# Altium PCB ESP32Designv1.1.PcbDoc (part 2 of 3)
Units mil, origin at the board's own origin, x right, y up, seen from the top; angles counter-clockwise.
Board outline 2700 x 1000 mil, 4 copper layers (L1, L2, L3, L4), stack 61.583 mil thick; 64 components, 73 nets, 299 pads, 159 vias.
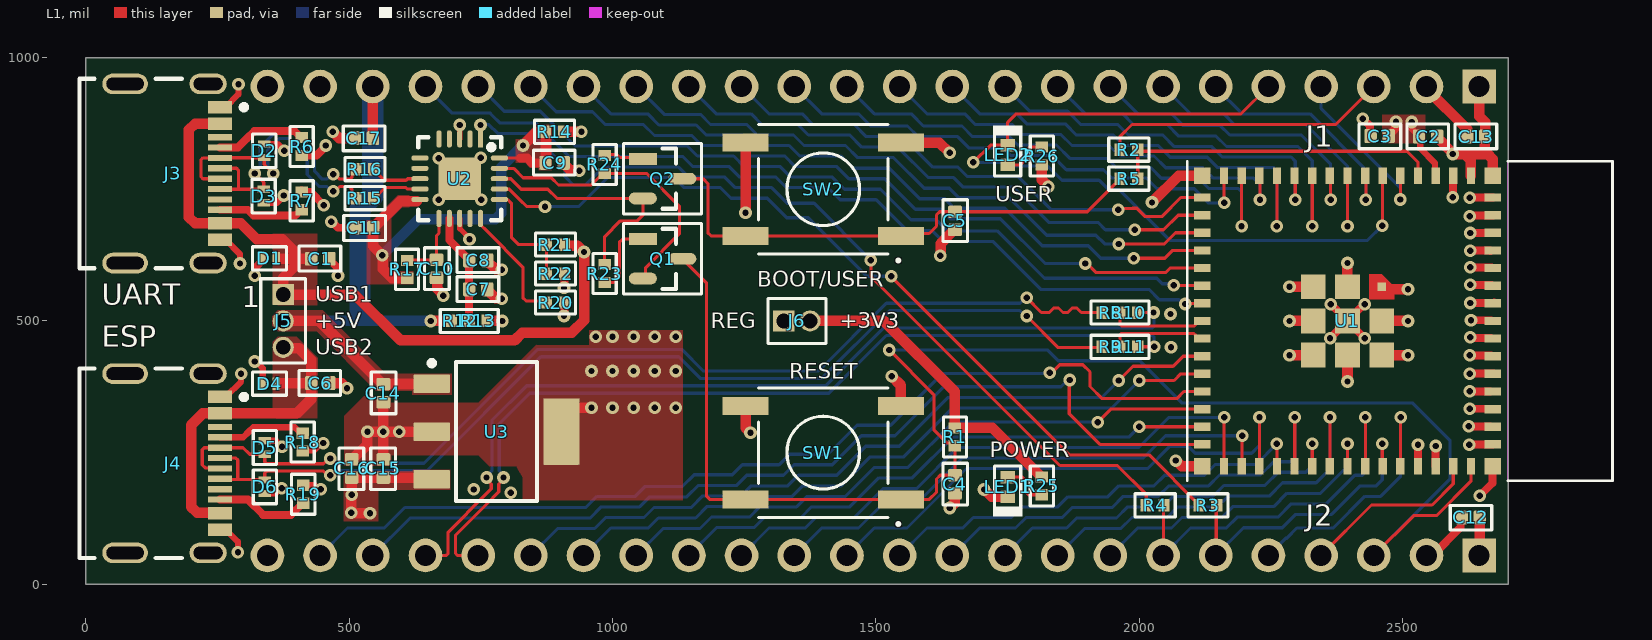
[diagram p0: L1 view]

## Part data (continued)
R2 R5: library part RC0402FR-0727RL, "RES 27 OHM 1% 1/16W 0402", Case Code (Imperial)=0402, Case Code (Metric)=1005, LCSC Part Number=C138021, Manufacturer="Yageo Group", Max Operating Temperature=155°C, Max Power Dissipation=63mW, Min Operating Temperature=-55°C, Power Dissipation=62.5mW, Supplier Part Number=YAG3086CT-ND, Temperature Coefficient=100ppm/°C, Tolerance=1%, Voltage Rating=50V, Case/Package=0402, Category="Chip SMD Resistors", China RoHS=Non-Compliant, ComponentLink1Description=https://datasheet.octopart.com:443/RC0402FR-0727RL-Yageo-datasheet-175887523.pdf?src-supplier=Newark, ComponentLink1URL=https://datasheet.octopart.com:443/RC0402FR-0727RL-Yageo-datasheet-175887523.pdf?src-supplier=Newark, ComponentLink2Description=https://datasheet.octopart.com:443/RC0402FR-0727RL-Yageo-datasheet-8324527.pdf?src-supplier=Newark, ComponentLink2URL=https://datasheet.octopart.com:443/RC0402FR-0727RL-Yageo-datasheet-8324527.pdf?src-supplier=Newark, ComponentLink3Description=https://datasheet.octopart.com:443/RC0402FR-0727RL-Yageo-datasheet-103092701.pdf?src-supplier=Upverter, ComponentLink3URL=https://datasheet.octopart.com:443/RC0402FR-0727RL-Yageo-datasheet-103092701.pdf?src-supplier=Upverter, ComponentLink4Description=https://datasheet.octopart.com:443/RC0402FR-0727RL-Yageo-datasheet-10408619.pdf?src-supplier=element14+APAC, ComponentLink4URL=https://datasheet.octopart.com:443/RC0402FR-0727RL-Yageo-datasheet-10408619.pdf?src-supplier=element14+APAC, ComponentLink5Description=https://datasheet.octopart.com:443/RC0402FR-0727RL-Yageo-datasheet-62067350.pdf?src-supplier=element14+APAC, ComponentLink5URL=https://datasheet.octopart.com:443/RC0402FR-0727RL-Yageo-datasheet-62067350.pdf?src-supplier=element14+APAC, ComponentLink6Description=https://datasheet.octopart.com:443/RC0402FR-0727RL-Yageo-datasheet-175423674.pdf?src-supplier=SOS+electronic, ComponentLink6URL=https://datasheet.octopart.com:443/RC0402FR-0727RL-Yageo-datasheet-175423674.pdf?src-supplier=SOS+electronic, ComponentLink7Description=https://datasheet.octopart.com:443/RC0402FR-0727RL-Yageo-datasheet-8329306.pdf?src-supplier=SOS+electronic, ComponentLink7URL=https://datasheet.octopart.com:443/RC0402FR-0727RL-Yageo-datasheet-8329306.pdf?src-supplier=SOS+electronic, ComponentLink8Description=https://datasheet.octopart.com:443/RC0402FR-0727RL-Yageo-datasheet-164759695.pdf?src-supplier=Future+Electronics, ComponentLink8URL=https://datasheet.octopart.com:443/RC0402FR-0727RL-Yageo-datasheet-164759695.pdf?src-supplier=Future+Electronics, ComponentLink9Description=https://datasheet.octopart.com:443/RC0402FR-0727RL-Yageo-datasheet-137700087.pdf?src-supplier=Future+Electronics, ComponentLink9URL=https://datasheet.octopart.com:443/RC0402FR-0727RL-Yageo-datasheet-137700087.pdf?src-supplier=Future+Electronics, ComponentLink10Description=https://datasheet.octopart.com:443/RC0402FR-0727RL-Yageo-datasheet-12531192.pdf?src-supplier=Future+Electronics, ComponentLink10URL=https://datasheet.octopart.com:443/RC0402FR-0727RL-Yageo-datasheet-12531192.pdf?src-supplier=Future+Electronics, ComponentLink11Description=https://datasheet.octopart.com:443/RC0402FR-0727RL-Yageo-datasheet-148775077.pdf?src-supplier=TME, ComponentLink11URL=https://datasheet.octopart.com:443/RC0402FR-0727RL-Yageo-datasheet-148775077.pdf?src-supplier=TME, ComponentLink12Description=https://datasheet.octopart.com/RC0402FR-0727RL-Yageo-datasheet-73766026.pdf, ComponentLink12URL=https://datasheet.octopart.com/RC0402FR-0727RL-Yageo-datasheet-73766026.pdf, ComponentLink13Description=http://sigma.octopart.com:80/conflict_mineral_statement/Yageo-company-3.pdf?src-supplier=Compliance+Statements, ComponentLink13URL=http://sigma.octopart.com:80/conflict_mineral_statement/Yageo-company-3.pdf?src-supplier=Compliance+Statements, ComponentLink14Description=http://sigma.octopart.com:80/rohs_statement/Yageo-company-2.pdf?src-supplier=Compliance+Statements, ComponentLink14URL=http://sigma.octopart.com:80/rohs_statement/Yageo-company-2.pdf?src-supplier=Compliance+Statements, Composition="Thick Film", Depth=500µm, Features="Moisture Resistant", Height=350µm, Lead Free="Lead Free", Length=1mm, Lifecycle Status=Production, Manufacturer Part Number=RC0402FR-0727RL, Military Standard=Not, Mounting Technology="Surface Mount", Number of Terminals=2, Number of Terminations=2, Pins=2, Power Rating=63mW, Pricing="1=0.1, 10=0.007, 25=0.0068, 50=0.0062, 100=0.0051, 250=0.00308 (USD)", REACH SVHC=Yes, RoHS=Compliant, Schedule B="8533210045, 8533210045|8533210045, 8533210045|8533210045|8533210045, 8533210045|8533210045|8533210045|8533210045", Stock=351229, Supplier=DigiKey, Termination=SMD/SMT, Voltage Rating (AC)=50V, Voltage Rating (DC)=50V, Weight=652.039032µg, Width=500µm, Working Voltage=50V
R3 R4 R8 R9 R10 R11 R12 R13 R14 R15 R16 R17: library part RC0402JR-070RL, "RES 0 OHM JUMPER 1/16W 0402", Case Code (Imperial)=0402, Manufacturer="Yageo Group", Max Operating Temperature=155°C, Max Power Dissipation=63mW, Min Operating Temperature=-55°C, Power Rating=62.5mW, Supplier Part Number=311-0.0JRDKR-ND, Temperature Coefficient=200ppm/°C, Tolerance=5%, Voltage Rating=50V, Case/Package=0402, Category="Chip SMD Resistors", China RoHS=Non-Compliant, ComponentLink1Description=https://datasheet.octopart.com:443/RC0402JR-070RL-Yageo-datasheet-182189538.pdf?src-supplier=IHS, ComponentLink1URL=https://datasheet.octopart.com:443/RC0402JR-070RL-Yageo-datasheet-182189538.pdf?src-supplier=IHS, ComponentLink2Description=https://datasheet.octopart.com:443/RC0402JR-070RL-Yageo-datasheet-10408619.pdf?src-supplier=Newark, ComponentLink2URL=https://datasheet.octopart.com:443/RC0402JR-070RL-Yageo-datasheet-10408619.pdf?src-supplier=Newark, ComponentLink3Description=https://datasheet.octopart.com:443/RC0402JR-070RL-Yageo-Group-datasheet-181964826.pdf?src-supplier=Newark, ComponentLink3URL=https://datasheet.octopart.com:443/RC0402JR-070RL-Yageo-Group-datasheet-181964826.pdf?src-supplier=Newark, ComponentLink4Description=https://datasheet.octopart.com:443/RC0402JR-070RL-Yageo-Group-datasheet-190305687.pdf?src-supplier=Future+Electronics, ComponentLink4URL=https://datasheet.octopart.com:443/RC0402JR-070RL-Yageo-Group-datasheet-190305687.pdf?src-supplier=Future+Electronics, ComponentLink5Description=https://datasheet.octopart.com:443/RC0402JR-070RL-Yageo-datasheet-164759695.pdf?src-supplier=Future+Electronics, ComponentLink5URL=https://datasheet.octopart.com:443/RC0402JR-070RL-Yageo-datasheet-164759695.pdf?src-supplier=Future+Electronics, ComponentLink6Description=https://datasheet.octopart.com:443/RC0402JR-070RL-Yageo-datasheet-137700087.pdf?src-supplier=Future+Electronics, ComponentLink6URL=https://datasheet.octopart.com:443/RC0402JR-070RL-Yageo-datasheet-137700087.pdf?src-supplier=Future+Electronics, ComponentLink7Description=https://datasheet.octopart.com:443/RC0402JR-070RL-Yageo-datasheet-12531192.pdf?src-supplier=Seeed+Studio, ComponentLink7URL=https://datasheet.octopart.com:443/RC0402JR-070RL-Yageo-datasheet-12531192.pdf?src-supplier=Seeed+Studio, ComponentLink8Description=https://datasheet.octopart.com:443/RC0402JR-070RL-Yageo-datasheet-8324527.pdf?src-supplier=TME, ComponentLink8URL=https://datasheet.octopart.com:443/RC0402JR-070RL-Yageo-datasheet-8324527.pdf?src-supplier=TME, ComponentLink9Description=https://datasheet.octopart.com:443/RC0402JR-070RL-Yageo-datasheet-62067350.pdf?src-supplier=Farnell, ComponentLink9URL=https://datasheet.octopart.com:443/RC0402JR-070RL-Yageo-datasheet-62067350.pdf?src-supplier=Farnell, ComponentLink10Description=https://datasheet.octopart.com:443/RC0402JR-070RL-Yageo-datasheet-8329306.pdf?src-supplier=element14, ComponentLink10URL=https://datasheet.octopart.com:443/RC0402JR-070RL-Yageo-datasheet-8329306.pdf?src-supplier=element14, ComponentLink11Description=https://datasheet.octopart.com:443/RC0402JR-070RL-Yageo-datasheet-505231.pdf?src-supplier=element14, ComponentLink11URL=https://datasheet.octopart.com:443/RC0402JR-070RL-Yageo-datasheet-505231.pdf?src-supplier=element14, ComponentLink12Description=https://datasheet.octopart.com:443/RC0402JR-070RL-Yageo-datasheet-175423674.pdf?src-supplier=SOS+electronic, ComponentLink12URL=https://datasheet.octopart.com:443/RC0402JR-070RL-Yageo-datasheet-175423674.pdf?src-supplier=SOS+electronic, ComponentLink13Description=https://datasheet.octopart.com/RC0402JR-070RL-Yageo-datasheet-73766026.pdf, ComponentLink13URL=https://datasheet.octopart.com/RC0402JR-070RL-Yageo-datasheet-73766026.pdf, ComponentLink14Description=http://sigma.octopart.com:80/conflict_mineral_statement/Yageo-company-3.pdf?src-supplier=Compliance+Statements, ComponentLink14URL=http://sigma.octopart.com:80/conflict_mineral_statement/Yageo-company-3.pdf?src-supplier=Compliance+Statements, ComponentLink15Description=http://sigma.octopart.com:80/rohs_statement/Yageo-company-2.pdf?src-supplier=Compliance+Statements, ComponentLink15URL=http://sigma.octopart.com:80/rohs_statement/Yageo-company-2.pdf?src-supplier=Compliance+Statements, Composition="Thick Film", Contact Plating=Tin, Depth=500µm, Features="Moisture Resistant", Height=350µm, Lead Free="Lead Free", Length=1mm, Lifecycle Status=Production, Manufacturer Part Number=RC0402JR-070RL, Military Standard=Not, Mounting Technology="Surface Mount", Number of Terminals=2, Number of Terminations=2, Packaging="Tape & Reel", Pins=2, Pricing="1=0.1, 10=0.010, 25=0.0064, 50=0.0056, 100=0.0048, 250=0.00404, 500=0.00356, 1000=0.00313, 5000=0.00237 (USD)", Radiation Hardening=No, REACH SVHC=Yes, RoHS=Compliant, Schedule B="8533290000, 8533290000|8533290000, 8533290000|8533290000|8533290000, 8533290000|8533290000|8533290000|8533290000", Stock=9204286, Supplier=DigiKey, Termination=SMD/SMT, Voltage Rating (DC)=50V, Width=500µm
R6 R7 R18 R19: library part AC0402FR-075K1L, "RES SMD 5.1K OHM 1% 1/16W 0402", Case Code (Imperial)=0402, Case Code (Metric)=1005, LCSC Part Number=C144745, Manufacturer="Yageo Group", Max Operating Temperature=155°C, Max Power Dissipation=63mW, Min Operating Temperature=-55°C, Power Dissipation=62.5mW, Supplier Part Number=YAG3503CT-ND, Temperature Coefficient=100ppm/°C, Tolerance=1%, Voltage Rating=50V, Case/Package=0402, Category="Chip SMD Resistors", China RoHS=Non-Compliant, ComponentLink1Description=https://datasheet.octopart.com:443/AC0402FR-075K1L-Yageo-datasheet-182189377.pdf?src-supplier=IHS, ComponentLink1URL=https://datasheet.octopart.com:443/AC0402FR-075K1L-Yageo-datasheet-182189377.pdf?src-supplier=IHS, ComponentLink2Description=https://datasheet.octopart.com:443/AC0402FR-075K1L-Yageo-datasheet-83209224.pdf?src-supplier=Upverter, ComponentLink2URL=https://datasheet.octopart.com:443/AC0402FR-075K1L-Yageo-datasheet-83209224.pdf?src-supplier=Upverter, ComponentLink3Description=https://datasheet.octopart.com:443/AC0402FR-075K1L-Yageo-datasheet-178509465.pdf?src-supplier=Newark, ComponentLink3URL=https://datasheet.octopart.com:443/AC0402FR-075K1L-Yageo-datasheet-178509465.pdf?src-supplier=Newark, ComponentLink4Description=https://datasheet.octopart.com/AC0402FR-075K1L-Yageo-datasheet-12512238.pdf, ComponentLink4URL=https://datasheet.octopart.com/AC0402FR-075K1L-Yageo-datasheet-12512238.pdf, ComponentLink5Description=https://datasheet.octopart.com:443/AC0402FR-075K1L-Yageo-Group-datasheet-189830439.pdf?src-supplier=Future+Electronics, ComponentLink5URL=https://datasheet.octopart.com:443/AC0402FR-075K1L-Yageo-Group-datasheet-189830439.pdf?src-supplier=Future+Electronics, ComponentLink6Description=https://datasheet.octopart.com:443/AC0402FR-075K1L-Yageo-datasheet-166720450.pdf?src-supplier=Future+Electronics, ComponentLink6URL=https://datasheet.octopart.com:443/AC0402FR-075K1L-Yageo-datasheet-166720450.pdf?src-supplier=Future+Electronics, ComponentLink7Description=https://datasheet.octopart.com:443/AC0402FR-075K1L-Yageo-datasheet-151884373.pdf?src-supplier=Future+Electronics, ComponentLink7URL=https://datasheet.octopart.com:443/AC0402FR-075K1L-Yageo-datasheet-151884373.pdf?src-supplier=Future+Electronics, ComponentLink8Description=https://datasheet.octopart.com:443/AC0402FR-075K1L-Yageo-datasheet-137699919.pdf?src-supplier=Future+Electronics, ComponentLink8URL=https://datasheet.octopart.com:443/AC0402FR-075K1L-Yageo-datasheet-137699919.pdf?src-supplier=Future+Electronics, ComponentLink9Description=https://datasheet.octopart.com:443/AC0402FR-075K1L-Yageo-datasheet-24580492.pdf?src-supplier=Future+Electronics, ComponentLink9URL=https://datasheet.octopart.com:443/AC0402FR-075K1L-Yageo-datasheet-24580492.pdf?src-supplier=Future+Electronics, ComponentLink10Description=https://datasheet.octopart.com:443/AC0402FR-075K1L-Yageo-datasheet-13029202.pdf?src-supplier=Future+Electronics, ComponentLink10URL=https://datasheet.octopart.com:443/AC0402FR-075K1L-Yageo-datasheet-13029202.pdf?src-supplier=Future+Electronics, ComponentLink11Description=https://datasheet.octopart.com:443/AC0402FR-075K1L-Yageo-Group-datasheet-164768995.pdf?src-supplier=ODG+(Origin+Data+Global), ComponentLink11URL=https://datasheet.octopart.com:443/AC0402FR-075K1L-Yageo-Group-datasheet-164768995.pdf?src-supplier=ODG+(Origin+Data+Global), ComponentLink12Description=http://sigma.octopart.com:80/conflict_mineral_statement/Yageo-company-3.pdf?src-supplier=Compliance+Statements, ComponentLink12URL=http://sigma.octopart.com:80/conflict_mineral_statement/Yageo-company-3.pdf?src-supplier=Compliance+Statements, ComponentLink13Description=http://sigma.octopart.com:80/rohs_statement/Yageo-company-2.pdf?src-supplier=Compliance+Statements, ComponentLink13URL=http://sigma.octopart.com:80/rohs_statement/Yageo-company-2.pdf?src-supplier=Compliance+Statements, Composition="Thick Film", Country of Origin="Mainland China, Taiwan", Depth=500µm, Export Control Classification Number (ECCN) Code=EAR99, Features="Automotive AEC-Q200, Moisture Resistant", Harmonized Tariff Schedule (HTS) Code=8533.21.00.30, Height=320µm, Introduction Date=2012-04-10, Lead Free="Lead Free", Length=1mm, Lifecycle Status=Production, Manufacturer Part Number=AC0402FR-075K1L, Military Standard=Not, Mounting Technology="Surface Mount", Number of Terminals=2, Number of Terminations=2, Power Rating=62.5mW, Pricing="1=0.1, 10=0.006, 25=0.0056, 50=0.0052, 100=0.0046, 250=0.00408 (USD)", REACH SVHC=Yes, RoHS=Compliant, Schedule B="8533210045, 8533210045|8533210045|8533210045|8533210045|8533210045|8533210045|8533210045|8533210045|8533210045|8533210045|8533210045|8533210045|8533210045|8533210045|8533210045|8533210045|8533210045|8533210045|8533210045|8533210045|8533210045|8533210045|8533210045|85", Stock=84006, Supplier=DigiKey, Width=500µm, Working Voltage=50V
R21: library part RT0402BRB074K7L, "RES SMD 4.7K OHM 0.1% 1/16W 0402", Case Code (Imperial)=0402, Case Code (Metric)=1005, LCSC Part Number=C7038386, Manufacturer="Yageo Group", Max Operating Temperature=155°C, Max Power Dissipation=63mW, Min Operating Temperature=-55°C, Power Rating=62.5mW, Supplier Part Number=YAG4155CT-ND, Temperature Coefficient=10ppm/°C, Tolerance=0.1%, Voltage Rating=50V, Case/Package=0402, Category="Chip SMD Resistors", China RoHS=Non-Compliant, ComponentLink1Description=https://datasheet.octopart.com:443/RT0402BRB074K7L-Yageo-datasheet-176402239.pdf?src-supplier=Future+Electronics, ComponentLink1URL=https://datasheet.octopart.com:443/RT0402BRB074K7L-Yageo-datasheet-176402239.pdf?src-supplier=Future+Electronics, ComponentLink2Description=https://datasheet.octopart.com:443/RT0402BRB074K7L-Yageo-datasheet-169971040.pdf?src-supplier=Future+Electronics, ComponentLink2URL=https://datasheet.octopart.com:443/RT0402BRB074K7L-Yageo-datasheet-169971040.pdf?src-supplier=Future+Electronics, ComponentLink3Description=https://datasheet.octopart.com:443/RT0402BRB074K7L-Yageo-datasheet-96443642.pdf?src-supplier=Upverter, ComponentLink3URL=https://datasheet.octopart.com:443/RT0402BRB074K7L-Yageo-datasheet-96443642.pdf?src-supplier=Upverter, ComponentLink4Description=https://datasheet.octopart.com:443/RT0402BRB074K7L-Yageo-Group-datasheet-141265893.pdf?src-supplier=ODG+(Origin+Data+Global), ComponentLink4URL=https://datasheet.octopart.com:443/RT0402BRB074K7L-Yageo-Group-datasheet-141265893.pdf?src-supplier=ODG+(Origin+Data+Global), ComponentLink5Description=https://datasheet.octopart.com/RT0402BRB074K7L-Yageo-datasheet-86813807.pdf, ComponentLink5URL=https://datasheet.octopart.com/RT0402BRB074K7L-Yageo-datasheet-86813807.pdf, ComponentLink6Description=http://sigma.octopart.com:80/conflict_mineral_statement/Yageo-company-3.pdf?src-supplier=Compliance+Statements, ComponentLink6URL=http://sigma.octopart.com:80/conflict_mineral_statement/Yageo-company-3.pdf?src-supplier=Compliance+Statements, ComponentLink7Description=http://sigma.octopart.com:80/rohs_statement/Yageo-company-2.pdf?src-supplier=Compliance+Statements, ComponentLink7URL=http://sigma.octopart.com:80/rohs_statement/Yageo-company-2.pdf?src-supplier=Compliance+Statements, Composition="Thin Film", Country of Origin="Mainland China", Export Control Classification Number (ECCN) Code=EAR99, Features="Moisture Resistant", Harmonized Tariff Schedule (HTS) Code=8533.21.00.30, Height=300µm, Introduction Date=2008-07-11, Length=1mm, Lifecycle Status=Production, Manufacturer Part Number=RT0402BRB074K7L, Mounting Technology="Surface Mount", Number of Terminals=2, Number of Terminations=2, Packaging="Tape & Reel", Pricing="1=0.43, 10=0.361, 25=0.3348, 50=0.3164, 100=0.2991, 250=0.27844, 500=0.26444, 1000=0.2518, 5000=0.22779 (USD)", REACH SVHC=Yes, RoHS=Compliant, Stock=1946, Supplier=DigiKey, Termination=SMD/SMT, Width=500µm, Working Voltage=50V
R25 R26: library part RC0402FR-071KL, "RES 1K OHM 1% 1/16W 0402", Case Code (Imperial)=0402, Manufacturer="Yageo Group", Max Operating Temperature=155°C, Min Operating Temperature=-55°C, Power Rating=62.5mW, Supplier Part Number=311-1.00KLRDKR-ND, Temperature Coefficient=100ppm/°C, Tolerance=1%, Voltage Rating=50V, Case Code (Metric)=0402, Case/Package=0402, Category="Chip SMD Resistors", China RoHS=Non-Compliant, ComponentLink1Description=https://datasheet.octopart.com:443/RC0402FR-071KL-Yageo-datasheet-175887523.pdf?src-supplier=Newark, ComponentLink1URL=https://datasheet.octopart.com:443/RC0402FR-071KL-Yageo-datasheet-175887523.pdf?src-supplier=Newark, ComponentLink2Description=https://datasheet.octopart.com:443/RC0402FR-071KL-Yageo-datasheet-10408619.pdf?src-supplier=Newark, ComponentLink2URL=https://datasheet.octopart.com:443/RC0402FR-071KL-Yageo-datasheet-10408619.pdf?src-supplier=Newark, ComponentLink3Description=https://datasheet.octopart.com:443/RC0402FR-071KL-Yageo-datasheet-8324527.pdf?src-supplier=Newark, ComponentLink3URL=https://datasheet.octopart.com:443/RC0402FR-071KL-Yageo-datasheet-8324527.pdf?src-supplier=Newark, ComponentLink4Description=https://datasheet.octopart.com:443/RC0402FR-071KL-Yageo-datasheet-164759695.pdf?src-supplier=Upverter, ComponentLink4URL=https://datasheet.octopart.com:443/RC0402FR-071KL-Yageo-datasheet-164759695.pdf?src-supplier=Upverter, ComponentLink5Description=https://datasheet.octopart.com:443/RC0402FR-071KL-Yageo-datasheet-103092701.pdf?src-supplier=Upverter, ComponentLink5URL=https://datasheet.octopart.com:443/RC0402FR-071KL-Yageo-datasheet-103092701.pdf?src-supplier=Upverter, ComponentLink6Description=https://sigma.octopart.com:443/138820526/technical_drawing/Yageo-RC0402FR-071KL.pdf?src-supplier=Upverter, ComponentLink6URL=https://sigma.octopart.com:443/138820526/technical_drawing/Yageo-RC0402FR-071KL.pdf?src-supplier=Upverter, ComponentLink7Description=https://datasheet.octopart.com:443/RC0402FR-071KL-Yageo-datasheet-98239111.pdf?src-supplier=Upverter, ComponentLink7URL=https://datasheet.octopart.com:443/RC0402FR-071KL-Yageo-datasheet-98239111.pdf?src-supplier=Upverter, ComponentLink8Description=https://datasheet.octopart.com:443/RC0402FR-071KL-Yageo-Group-datasheet-190305687.pdf?src-supplier=Future+Electronics, ComponentLink8URL=https://datasheet.octopart.com:443/RC0402FR-071KL-Yageo-Group-datasheet-190305687.pdf?src-supplier=Future+Electronics, ComponentLink9Description=https://datasheet.octopart.com:443/RC0402FR-071KL-Yageo-datasheet-12531192.pdf?src-supplier=Future+Electronics, ComponentLink9URL=https://datasheet.octopart.com:443/RC0402FR-071KL-Yageo-datasheet-12531192.pdf?src-supplier=Future+Electronics, ComponentLink10Description=https://datasheet.octopart.com:443/RC0402FR-071KL-Yageo-datasheet-137700087.pdf?src-supplier=Future+Electronics, ComponentLink10URL=https://datasheet.octopart.com:443/RC0402FR-071KL-Yageo-datasheet-137700087.pdf?src-supplier=Future+Electronics, ComponentLink11Description=https://datasheet.octopart.com:443/RC0402FR-071KL-Yageo-datasheet-8324255.pdf?src-supplier=Future+Electronics, ComponentLink11URL=https://datasheet.octopart.com:443/RC0402FR-071KL-Yageo-datasheet-8324255.pdf?src-supplier=Future+Electronics, ComponentLink12Description=https://datasheet.octopart.com:443/RC0402FR-071KL-Yageo-datasheet-62067350.pdf?src-supplier=Farnell, ComponentLink12URL=https://datasheet.octopart.com:443/RC0402FR-071KL-Yageo-datasheet-62067350.pdf?src-supplier=Farnell, ComponentLink13Description=https://datasheet.octopart.com:443/RC0402FR-071KL-Yageo-datasheet-8329306.pdf?src-supplier=element14, ComponentLink13URL=https://datasheet.octopart.com:443/RC0402FR-071KL-Yageo-datasheet-8329306.pdf?src-supplier=element14, ComponentLink14Description=https://datasheet.octopart.com:443/RC0402FR-071KL-Yageo-datasheet-505231.pdf?src-supplier=element14, ComponentLink14URL=https://datasheet.octopart.com:443/RC0402FR-071KL-Yageo-datasheet-505231.pdf?src-supplier=element14, ComponentLink15Description=https://datasheet.octopart.com:443/RC0402FR-071KL-Yageo-datasheet-175423674.pdf?src-supplier=SOS+electronic, ComponentLink15URL=https://datasheet.octopart.com:443/RC0402FR-071KL-Yageo-datasheet-175423674.pdf?src-supplier=SOS+electronic, ComponentLink16Description=https://datasheet.octopart.com:443/RC0402FR-071KL-Yageo-datasheet-148775077.pdf?src-supplier=TME, ComponentLink16URL=https://datasheet.octopart.com:443/RC0402FR-071KL-Yageo-datasheet-148775077.pdf?src-supplier=TME, ComponentLink17Description=https://datasheet.octopart.com:443/RC0402FR-071KL-Yageo-datasheet-79472498.pdf?src-supplier=Megastar, ComponentLink17URL=https://datasheet.octopart.com:443/RC0402FR-071KL-Yageo-datasheet-79472498.pdf?src-supplier=Megastar, ComponentLink18Description=https://datasheet.octopart.com/RC0402FR-071KL-Yageo-datasheet-73766026.pdf, ComponentLink18URL=https://datasheet.octopart.com/RC0402FR-071KL-Yageo-datasheet-73766026.pdf, ComponentLink19Description=http://sigma.octopart.com:80/conflict_mineral_statement/Yageo-company-3.pdf?src-supplier=Compliance+Statements, ComponentLink19URL=http://sigma.octopart.com:80/conflict_mineral_statement/Yageo-company-3.pdf?src-supplier=Compliance+Statements, ComponentLink20Description=http://sigma.octopart.com:80/rohs_statement/Yageo-company-2.pdf?src-supplier=Compliance+Statements, ComponentLink20URL=http://sigma.octopart.com:80/rohs_statement/Yageo-company-2.pdf?src-supplier=Compliance+Statements, Composition="Thick Film", Contact Plating=Tin, Depth=500µm, Height=350µm, Lead Free="Lead Free", Length=1mm, Lifecycle Status=Production, Manufacturer Part Number=RC0402FR-071KL, Military Standard=Not, Mounting Technology="Surface Mount", Number of Terminals=2, Packaging="Tape & Reel", Pins=2, Pricing="1=0.1, 10=0.021, 25=0.0152, 50=0.012, 100=0.0097, 250=0.0074, 500=0.00612, 1000=0.00512, 5000=0.00355 (USD)", Radiation Hardening=No, REACH SVHC=Yes, RoHS=Compliant, Schedule B="8533210045, 8533210045|8533210045|8533210045|8533210045|8533210045|8533210045|8533210045|8533210045|8533210045|8533210045|8533210045|8533210045|8533210045|8533210045|8533210045|8533210045|8533210045|8533210045|8533210045|8533210045|8533210045|8533210045|8533210045|85", Stock=9117860, Supplier=DigiKey, Termination=SMD/SMT, Voltage Rating (AC)=50V, Voltage Rating (DC)=50V, Width=500µm, Working Voltage=50V
SW1 SW2: "SWITCH TACTILE SPST-NO 0.05A 12V", LCSC Part Number=C20773526, Manufacturer="C&K Components", Max Operating Temperature=60°C, Max Voltage Rating (DC)=12V, Min Operating Temperature=-20°C, Operating Force=2.55N, Supplier Part Number=CKN9084CT-ND, Category="Tactile Switches", ComponentLink1Description=https://datasheet.octopart.com:443/Y97HT23B5EAFP-C%26K-Components-datasheet-11552216.pdf?src-supplier=Master+Electronics, ComponentLink1URL=https://datasheet.octopart.com:443/Y97HT23B5EAFP-C%26K-Components-datasheet-11552216.pdf?src-supplier=Master+Electronics, Contact Material=Bronze, Contact Plating=Silver, Manufacturer Part Number=Y97HT23B5EAFP, Mechanical Life=100kcycles, Mounting Technology="Surface Mount", Packaging="Tape & Reel", Pricing="1=0.32, 10=0.275, 25=0.2576, 100=0.2307, 250=0.2138, 500=0.20176 (USD)", Radiation Hardening=No, RoHS=Compliant, Stock=125300, Supplier=DigiKey, Termination="Gull Wing", Throw Configuration=SPST
U1: "20.5dBm ESP32-S3FN8 Chip 2.4GHz SMD WiFi Modules ROHS", LCSC Part Number=C2913206, Manufacturer="Espressif Systems", Supplier Part Number=5407-ESP32-S3-MINI-1-N8DKR-ND, Category="RF Transceiver Modules and Modems", ComponentLink1Description=https://datasheet.octopart.com:443/ESP32-S3-MINI-1-N8-Espressif-Systems-datasheet-188867343.pdf?src-supplier=TME, ComponentLink1URL=https://datasheet.octopart.com:443/ESP32-S3-MINI-1-N8-Espressif-Systems-datasheet-188867343.pdf?src-supplier=TME, ComponentLink2Description=https://datasheet.octopart.com:443/ESP32-S3-MINI-1-N8-Espressif-Systems-datasheet-165560562.pdf?src-supplier=TME, ComponentLink2URL=https://datasheet.octopart.com:443/ESP32-S3-MINI-1-N8-Espressif-Systems-datasheet-165560562.pdf?src-supplier=TME, ComponentLink3Description=https://datasheet.octopart.com:443/ESP32-S3-MINI-1-N8-Espressif-Systems-datasheet-165560559.pdf?src-supplier=TME, ComponentLink3URL=https://datasheet.octopart.com:443/ESP32-S3-MINI-1-N8-Espressif-Systems-datasheet-165560559.pdf?src-supplier=TME, Manufacturer Part Number=ESP32-S3-MINI-1-N8, Pricing="1=5.28, 10=4.566, 25=4.3196, 100=3.9802, 250=3.7768 (USD)", RoHS=Compliant, Stock=8015, Supplier=DigiKey
U2: "IC USB SERIAL FULL UART 20QFN", Ambient Temperature Range High=85°C, Case/Package=QFN, Clock Frequency=12.02MHz, LCSC Part Number=C132159, Manufacturer=FTDI, Max Supply Current=8.4mA, Max Supply Voltage=5.5V, Min Operating Temperature=-40°C, Min Supply Voltage=2.97V, Operating Supply Current=8mA, Operating Supply Voltage=5V, Supplier Part Number=768-1128-6-ND, Category="UART Interface ICs", ComponentLink1Description=https://datasheet.octopart.com:443/FT231XQ-R-FTDI-datasheet-182343132.pdf?src-supplier=IHS, ComponentLink1URL=https://datasheet.octopart.com:443/FT231XQ-R-FTDI-datasheet-182343132.pdf?src-supplier=IHS, ComponentLink2Description=https://datasheet.octopart.com:443/FT231XQ-R-FTDI-datasheet-11021087.pdf?src-supplier=HQonline, ComponentLink2URL=https://datasheet.octopart.com:443/FT231XQ-R-FTDI-datasheet-11021087.pdf?src-supplier=HQonline, ComponentLink3Description=https://datasheet.octopart.com:443/FT231XQ-R-FTDI-datasheet-28834672.pdf?src-supplier=SOS+electronic, ComponentLink3URL=https://datasheet.octopart.com:443/FT231XQ-R-FTDI-datasheet-28834672.pdf?src-supplier=SOS+electronic, ComponentLink4Description=https://datasheet.octopart.com:443/FT231XQ-R-FTDI-datasheet-68321328.pdf?src-supplier=TME, ComponentLink4URL=https://datasheet.octopart.com:443/FT231XQ-R-FTDI-datasheet-68321328.pdf?src-supplier=TME, ComponentLink5Description=https://datasheet.octopart.com:443/FT231XQ-R-FTDI-datasheet-134530624.pdf?src-supplier=SHENGYU+ELECTRONICS, ComponentLink5URL=https://datasheet.octopart.com:443/FT231XQ-R-FTDI-datasheet-134530624.pdf?src-supplier=SHENGYU+ELECTRONICS, Data Rate=12Mbps, Height=800µm, Height - Seated (Max)=800µm, Interface="UART, USB", Lead Free="Lead Free", Length=4mm, Lifecycle Status=Production, Manufacturer Part Number=FT231XQ-R, Max Operating Temperature=85°C, Mounting Technology="Surface Mount", Number of Channels=1, Number of Terminals=20, Pins=20, Pricing="1=2.34, 25=2.27, 100=2.2, 250=2.15728 (USD)", REACH SVHC=Yes, RoHS=Compliant, Supplier=DigiKey, Terminal Pitch=500µm, Weight=123.008581mg, Width=4mm
U3: "IC REG LIN 3.3V 1.5A SOT-223-4", Case/Package=SOT-223, Dropout Voltage=340mV, Input Bias Current=1mA, LCSC Part Number=C181262, Manufacturer="Texas Instruments", Manufacturer Lifecycle Status=ACTIVE, Max Operating Temperature=125°C, Max Output current=1.5A, Max Output Voltage=3.3V, Max Supply Voltage=20V, Min Current Limit=1.6A, Min Input Voltage=2.1V, Min Operating Temperature=-40°C, Supplier Part Number=296-24897-6-ND, Accuracy=3%, Category="LDO Voltage Regulators", ComponentLink1Description=https://datasheet.octopart.com:443/TL1963A-33DCYR-Texas-Instruments-datasheet-36835243.pdf?src-supplier=Texas+Instruments, ComponentLink1URL=https://datasheet.octopart.com:443/TL1963A-33DCYR-Texas-Instruments-datasheet-36835243.pdf?src-supplier=Texas+Instruments, ComponentLink2Description=https://octopart.com:443/opatz8j6/c1?t=I9SKT4ogVbUqqJVUhOtFn7HP2zd1F-RcZafLWtRoxwNWPyBkwAwb-yx9ZSnwe_5Kk0t-x3nwsx3oPWANtEZ8--0jdWBBGiC53he0xymSZfYvAkyUb4iyans26l6gsWmN0J4J21VMqnCo5bC6D7qy4-lZT_QUrM00Mo2Es69XWRCLkroKTCTAjT1gMu2fwY5EpJFr6P3ROUQKHkC2aYUxigPoy_iRXJw-lDlyTFhVN44z6KAUdNPu68MrEEJXnzwklK7odPlJOlm1APymDEIevEfo4onEsG3lhGnsYkYhvWngX62Drh06_I7i_c6FAyW_cYlPdeniNjAqXPVhM3vEwkrEoJDzQRNBGcGGDxmHq3fBvC8d69r7kOoagN0egqfZnaG6Ogo&src-supplier=Texas+Instruments, ComponentLink2URL=https://octopart.com:443/opatz8j6/c1?t=I9SKT4ogVbUqqJVUhOtFn7HP2zd1F-RcZafLWtRoxwNWPyBkwAwb-yx9ZSnwe_5Kk0t-x3nwsx3oPWANtEZ8--0jdWBBGiC53he0xymSZfYvAkyUb4iyans26l6gsWmN0J4J21VMqnCo5bC6D7qy4-lZT_QUrM00Mo2Es69XWRCLkroKTCTAjT1gMu2fwY5EpJFr6P3ROUQKHkC2aYUxigPoy_iRXJw-lDlyTFhVN44z6KAUdNPu68MrEEJXnzwklK7odPlJOlm1APymDEIevEfo4onEsG3lhGnsYkYhvWngX62Drh06_I7i_c6FAyW_cYlPdeniNjAqXPVhM3vEwkrEoJDzQRNBGcGGDxmHq3fBvC8d69r7kOoagN0egqfZnaG6Ogo&src-supplier=Texas+Instruments, ComponentLink3Description=https://datasheet.octopart.com:443/TL1963A-33DCYR-Texas-Instruments-datasheet-10255270.pdf?src-supplier=Texas+Instruments, ComponentLink3URL=https://datasheet.octopart.com:443/TL1963A-33DCYR-Texas-Instruments-datasheet-10255270.pdf?src-supplier=Texas+Instruments, ComponentLink4Description=https://sigma.octopart.com:443/49253063/technical_drawing/Texas-Instruments-TL1963A-33DCYR.pdf?src-supplier=Texas+Instruments, ComponentLink4URL=https://sigma.octopart.com:443/49253063/technical_drawing/Texas-Instruments-TL1963A-33DCYR.pdf?src-supplier=Texas+Instruments, ComponentLink5Description=https://datasheet.octopart.com:443/TL1963A-33DCYR-Texas-Instruments-datasheet-159117591.pdf?src-supplier=Augswan, ComponentLink5URL=https://datasheet.octopart.com:443/TL1963A-33DCYR-Texas-Instruments-datasheet-159117591.pdf?src-supplier=Augswan, ComponentLink6Description=https://datasheet.octopart.com:443/TL1963A-33DCYR-Texas-Instruments-datasheet-21820479.pdf?src-supplier=Newark, ComponentLink6URL=https://datasheet.octopart.com:443/TL1963A-33DCYR-Texas-Instruments-datasheet-21820479.pdf?src-supplier=Newark, ComponentLink7Description=https://datasheet.octopart.com:443/TL1963A-33DCYR-Texas-Instruments-datasheet-16079880.pdf?src-supplier=Farnell, ComponentLink7URL=https://datasheet.octopart.com:443/TL1963A-33DCYR-Texas-Instruments-datasheet-16079880.pdf?src-supplier=Farnell, ComponentLink8Description=https://datasheet.octopart.com:443/TL1963A-33DCYR-Texas-Instruments-datasheet-14171511.pdf?src-supplier=iiiC, ComponentLink8URL=https://datasheet.octopart.com:443/TL1963A-33DCYR-Texas-Instruments-datasheet-14171511.pdf?src-supplier=iiiC, ComponentLink9Description=http://sigma.octopart.com:80/reach_statement/Texas-Instruments-company-64.pdf?src-supplier=Compliance+Statements, ComponentLink9URL=http://sigma.octopart.com:80/reach_statement/Texas-Instruments-company-64.pdf?src-supplier=Compliance+Statements, ComponentLink10Description=http://sigma.octopart.com:80/conflict_mineral_statement/Texas-Instruments-company-63.pdf?src-supplier=Compliance+Statements, ComponentLink10URL=http://sigma.octopart.com:80/conflict_mineral_statement/Texas-Instruments-company-63.pdf?src-supplier=Compliance+Statements, Contact Plating=Tin, Height=1.8mm, Lead Free="Lead Free", Length=6.5mm, Lifecycle Status=Production, Manufacturer Part Number=TL1963A-33DCYR, Min Output Voltage=3.3V, Nominal Output Voltage=3.3V, Number of Outputs=1, Number of Regulators=1, Output Current=1.5A, Output Type=Fixed, Output Voltage=3.3V, Pins=4, Polarity=Positive, Pricing="1=3.22, 10=2.414, 25=2.212, 100=1.9903, 250=1.88444, 500=1.85588 (USD)", Quiescent Current=1mA, Radiation Hardening=No, REACH SVHC=No, RoHS=Compliant, Schedule B="8542390000, 8542390000|8542390000|8542390000|8542390000|8542390000", Stock=5272, Supplier=DigiKey, Thickness=1.6mm, Width=3.5mm

## Via types
v1: diameter 24, hole 12, L1 to L4, tented both sides, 159 vias

## Nets (pads, with @x,y where several pads share a name; then routed paths per layer and width w, separated by ;. In a path a pad name is that pad's centre, name@x,y a point inside that pad or via, vN(x,y) a via of type N, cw(c..) or ccw(c..) an arc to the next point about the centre after c; other vN are vias at no path point)
3V3_FTDI: C9.2 C11.2 R14.2 R17.1 U2.10 U2.20 | length 850.4
  L1 w6: U2.20 825,809.37
  L1 w16.84: 825,809.37 837.7,809.37 847.07,800 C9.2
  L1 w20: R17.1 582.01,580.99 563.77,599.23 563.77,624.23 v1(563,625) 546.2,641.8 546.2,678.38 548.02,680.19 549.39,680.19 596.75,727.54 600,727.54 U2.10@628.06,727.54 ; v1@830.77,833.77 854.19,857.19 872.36,857.19 R14.2@872.89,857.72 ; C9.2 872.89,800.1 R14.2@872.89,857.72 ; R14.2@872.89,857.72 872.89,858.9 R14.2 872.99,857.82 R14.2@872.89,857.72
  L4 w20: v1(563,625) 631,693 777.28,693 789,704.72 789,792 v1(830,833)
+3V3: C2.2 C3.2 C12.2 C13.2 J1.2 J2.1 J6.2 R1.2 R13.1 R14.1 R25.2 R26.2 U1.3 | length 4421.5
  L1 w12: v1(2517.3,877.7) 2517.3,864.57 2524.67,857.19 2524.98,857.19 2530.8,851.38 C2.2 ; C2.2@2533.01,849.16 2533.01,827.49 2561.1,799.41 2561.1,776.85 U1.3
  L1 w15: C3.2 2477.52,855.31 2477.52,856.69 2485.28,864.45 2485.28,876.28 v1(2487,878)
  L1 w20: R13.1 v1(791,500) ; R14.1 v1(941,859) ; J6.2 1515.25,500 1650,365.25 R1.2 1720.82,297.01 1813.82,204.01 R25.2 ; R26.2 1815,768.08 1827,756.08 v1(1827,755) ; J1.2 2545,941 2622,864 C13.2 ; J2.1 2646.2,56.2 C12.2
  L2 w15: v1(2487,878) 2517.01,877.99 v1(2517.3,877.7)
  L2 w20: v1@2517.3,877.34 2518.75,877.34 2531.82,864.26 2548.37,864.26 2563,849.63 2563,316.75 2594.35,285.39 2594.35,174.39 2645,123.75 J2.1
  L2 w40: v1@793,500 808.57,500 832,523.43 832,750 v1(941,859) 1099,859 1203,755 1377,755 ; J6.2 1375,753 1377,755 ; v1@2517.3,877.34 v1(2517.3,877.7) ; J1.2 2540.41,940.41 2540.41,900.82 v1(2517.3,877.7) ; 1377,755 v1(1827,755) 1994.6,755 2062.1,822.5 2475.5,822.5 2517.3,864.3 v1(2517.3,877.7)
+3V3_REG: C15.2 C16.2 J6.1 U3.3 | length 1295.2
  L1 w20: v1(539.77,135.23) 504.77,135.23 v1(504,136) 504.5,136.5 504.5,169.5 v1(505,170) C16.2 C15.2 565.8,202 654.42,202 U3.3
  L2 w20: v1(504,136) v1@504.5,136.5 ; v1@504.5,169.5 v1(505,170)
  L2 w30: v1(504,136) v1@539,136 ; v1@504.5,136.5 v1@504.5,169.5 ; v1(539.77,135.23) 613.81,135.23 ; 1325,444 J6.1
  L2 w50: 613.81,135.23 730.58,252 1133,252 1325,444
+5V: C14.2 C17.2 J1.22 J5.2 R12.1 U3.1 | length 1191.8
  L1 w20: J5.2 443.83,500 563.62,380.2 C14.2 565.17,380.38 656.8,380.38 U3.1 ; J1.22 545.1,944.9 545.1,847.1 C17.2 ; v1(655,500) R12.1
  L4 w20: J5.2 v1(655,500)
  L4 w40: 521,512 521,713.25 545,737.25 J1.22
+5V_VBUS1: C1.2 D1.2 J3.A4B9 J3.B4A9 J5.1 R21.2 | length 1402.4
  L1 w20: J3.A4B9 207.72,874.41 196,862.69 196,697.15 207.72,685.43 J3.B4A9 294.43,685.43 324.86,655 372.78,655 398.56,629.22 398.56,618.5 ; 370,618.5 398.56,618.5 ; C1.2@427.12,618.5 398.56,618.5 ; R21.2 909.01,643.82 909.64,643.19 932.73,643.19 944.92,631 v1(946,631) 946,501.25 922.25,477.51 828.51,477.51 814,463 598,463 511,550 J5.1 375,582 398.56,605.56 398.56,618.5
+5V_VBUS2: C6.2 D4.2 J4.A4B9 J4.B4A9 J5.3 | length 658
  L1 w20: J4.B4A9 242.64,135.43 242.48,135.59 211.72,135.59 200,147.31 200,302 222.41,324.41 401.06,324.41 427.8,351.15 C6.2 ; 370,381.5 427.3,381.5 C6.2 ; J5.3 376.38,448.62 404.33,448.62 427.8,425.15 C6.2
+VCC_FTDI: C7.2 C8.2 R12.2 R13.2 U2.12 | length 199.7
  L1 w15: U2.12 690.32,653.86 727.8,616.38 C8.2 C7.2 R13.2@727.8,510.39
"BTN GPIO0": C5.2 Q2.3 R5.1 SW2.1 SW2.2 | length 988.6
  L1 w6: Q2.3 1172,770 1181,761 1181,667.28 1186.86,661.42 SW2.2 SW2.1 1552.08,666 1601,666 1615,680 1615,701.35 1620.86,707.2 C5.2 1901.38,707.2 1962.99,768.82 R5.1
CHIP_PU: C4.2 J2.3 Q1.3 R1.1 SW1.1 SW1.2 U1.45 | length 2957.6
  L1 w6: Q1.3 1178.58,571.84 1178.58,167.28 1184.44,161.42 SW1.2 SW1.1 1601.42,161.42 1615,175 1615,200 1622.2,207.2 C4.2 R1.1 1644.37,268.62 1634.73,268.62 1610,293.35 1610,360 v1(1525,445) ; J2.3 2520.6,130.6 2564.02,130.6 2629.28,195.86 U1.45
  L4 w6: v1(1525,445) 1825.18,445 1845.75,424.44 2000.75,424.44 2081.18,344 2519.18,344 2589.35,273.83 2589.35,199.35 J2.3
CON1_USB_N: D2.2 J3.A7 J3.B7 R15.1 | length 533.7
  L1 w6.03: J3.A7 222.53,770.08 219,773.61 219,805.92 222.53,809.45 J3.B7 255.5,809.83 338.62,809.83 D2.2 339,797 v1(356,780) ; v1(470,746) 473.36,746 482.52,755.16 500.17,755.16 505.38,749.95 505.38,740.61 R15.1
  L4 w6.03: v1(356,780) 356,782.03 345.51,792.52 345.51,824.06 367.47,846.01 386.53,846.01 420.45,812.09 420.45,777.97 443.31,755.11 457.48,755.11 466.6,746 v1(470,746)
CON1_USB_P: D3.2 J3.A6 J3.B6 R16.1 | length 518.3
  L1 w6.03: J3.B6 255.42,750.09 337.7,750.09 D3.2 338,763 v1(321,780) ; J3.A6 286.47,789.76 290,786.23 290,750.37 ; v1(469.77,778.26) 473.22,778.26 482.29,769.19 501.84,769.19 505.38,772.72 505.38,780.39 R16.1
  L4 w6.03: v1(321,780) 321,782.03 331.49,792.52 331.49,829.87 361.66,860.05 392.34,860.05 434.48,817.91 434.48,783.79 449.12,769.14 457.26,769.14 466.37,778.26 v1(469.77,778.26)
CON2_USB_N: D5.2 J4.A7 J4.B7 R8.1 | length 1993.3
  L1 w6.03: J4.A7 254.16,221.03 226.97,221.03 221.45,226.55 221.45,255.92 224.98,259.45 298.69,259.45 311.13,247 D5.2 340,232.56 343.53,229.03 451.48,229.03 461.45,239 v1(464,239) ; v1(1786,544) 1814,516 1826,516 1829.01,516 1837.51,524.5 1846.51,524.5 1855.01,516 1864.01,516 1872.51,524.5 1881.51,524.5 1890.01,516 1898,516 R8.1
  L4 w6.03: v1(464,239) 467.53,239 476.52,230.01 485.74,230.01 ; 485.76,230.03 642.19,230.03 858.19,446.03 1131.36,446.03 1172.36,405.03 1391.19,405.03 1519.92,533.76 1773.48,533.76 1783.72,544 v1(1786,544)
CON2_USB_P: D6.2 J4.A6 J4.B6 R9.1 | length 1962.5
  L1 w6.03: J4.A6 285.24,239.76 288.77,236.23 288.77,199.43 289,199.2 ; J4.B6@260.28,203.16 256.31,199.2 289,199.2 ; v1(464,207) 459.48,207 451.48,215 343.53,215 340,211.47 D6.2 338.8,199.2 289,199.2 ; v1(1786,509.5) 1846.06,449.44 1927.44,449.44 R9.1
  L4 w6.03: v1(464,207) 467.53,207 476.52,215.99 491.56,215.99 648,216 864,432 1125.55,432 1166.55,391 1397,391 1525.73,519.73 1773.48,519.73 1783.72,509.5 v1(1786,509.5)
"CON GPIO0": J1.3 R2.1 | length 546.4
  L1 w6: R2.1 1962.99,849.99 1986,873 2373,873 J1.3
CON_ESP_USB_N: J2.21 R10.1 | length 1725.6
  L1 w6.03: J2.21 684.45,55 687.99,58.53 687.99,98.97 759.75,170.73 759.75,171.17 769.99,181.41 769.99,190.48 761,199.47 v1(761,203) ; R10.1 v1(2027,516)
  L4 w6.03: v1(761,203) 761,205.52 771,215.52 771,311.03 836.89,376.92 1404.53,376.92 1514.09,486.48 2023.97,486.48 2027.5,490.01 2027.5,515.5 v1(2027,516)
CON_ESP_USB_P: J2.20 R11.1 | length 1694.7
  L1 w6.03: J2.20 705.55,55 702.01,58.53 702.01,93.16 773.78,164.92 773.78,165.36 784.01,175.6 784.01,190.48 793,199.47 v1(793,203) ; R11.1 v1(2028,451)
  L4 w6.03: v1(793,203) 793,207.55 785.03,215.52 785.03,305.22 842.7,362.89 1410.34,362.89 1519.9,472.45 2024.47,472.45 2028,468.92 v1(2028,451)
DRT_FTDI: Q2.2 R23.1 U2.18 | length 462.1
  L1 w6: U2.18 806.81,770 826.81,750 877.18,750 894.59,732.6 Q2.2 1057.58,700.58 1047,690 1015,690 985,660 R23.1
ESP_USB_N: R8.2 R10.2 U1.23 | length 184.8
  L1 w6.03: R8.2 1962.98,494.05 1966.52,490.52 2040.87,490.52 2041.11,490.28 2103.17,490.28 2106.71,493.82 2106.71,495.14 2111.57,500 U1.23
ESP_USB_P: R9.2 R11.2 U1.24 | length 184.8
  L1 w6.03: R11.2 1962.98,472.96 1966.52,476.49 2035.06,476.49 2035.3,476.25 2103.17,476.25 2106.71,472.72 2106.71,471.39 2111.57,466.54 U1.24
FTDI_RESET: C10.2 R17.2 U2.11 | length 136.8
  L1 w6: R17.2 610.6,615.61 665.4,615.61 C10.2 666,662 670.63,666.63 U2.11
FTDI_USB_N: R15.2 U2.9 | length 98.8
  L1 w6.03: R15.2@547.01,732 547.01,734.18 554.62,741.8 556.8,741.8 568.15,753.14 600,753.14 608.14,753.14 610.97,750.32 U2.9
FTDI_USB_P: R16.2 U2.8 | length 95.7
  L1 w6.03: R16.2@547.83,786 566.65,767.17 600,767.17 608.17,767.17 611,770 U2.8
GND: C1.1 C2.1 C3.1 C4.1 C5.1 C6.1 C7.1 C8.1 C9.1 C10.1 C11.1 C12.1 C13.1 C14.1 C15.1 C16.1 C17.1 D1.1 D2.1 D3.1 D4.1 D5.1 D6.1 J1.1 J1.23 J2.2 J2.24 J3.A1B12 J3.B1A12 J3.S1 J3.S2 J3.S3 J3.S4 J4.A1B12 J4.B1A12 J4.S1 J4.S2 J4.S3 J4.S4 LED1.1 R6.1 R7.1 R18.1 R19.1 R20.2 R22.1 SW1.3 SW1.4 SW2.3 SW2.4 U1.1 U1.2 U1.42 U1.43 U1.46 U1.47 U1.48 U1.49 U1.50 U1.51 U1.52 U1.53 U1.54 U1.55 U1.56 U1.57 U1.58 U1.59 U1.60 U1.61 U1.62 U1.63 U1.64 U1.65 U1.66 U1.67 U1.68 U1.69 U1.70 U1.71 U1.72 U1.73 U2.3 U2.13 U2.21 U3.2 U3.4 | length 4060.9
  L1 w6: U3.4@895,232.01 905.99,243 U3.4@912,243 ; v1(2595,735) v1@2595.41,735.41 ; U1.2@2595.41,775.65 U1.2@2595.87,776.11
  L1 w10.01: U2.13 710,675.18 728.49,656.68 v1(728.49,655) ; U2.3 v1(710,872)
  L1 w12: J4.B1A12 265.94,103.94 289,80.88 v1(289,61) ; J4.A1B12 265.94,355.91 295,384.96 v1(295,400) ; J3.B1A12 265.94,653.94 293,626.88 v1(293,609) ; J3.A1B12 265.94,905.91 290,929.96 v1(290,949) ; v1(321,423) 323.63,423 336.2,410.43 D4.1 ; D3.1 363.2,724.2 376,737 v1(376,738) ; D2.1@338,835.8 D2.1 364.2,835.8 v1(377,823) ; D6.1 360.16,172.41 370.2,182.45 v1(372.04,182.45) ; D5.1 361.16,272.59 v1(372.75,261) ; R18.1 413.72,254.71 434.18,254.71 447.66,268.2 v1(450.91,268.2) ; R19.1@413,192.01 416.68,188.33 435.05,188.33 443,180.37 v1(446.25,180.37)
  L1 w15: v1(321,586) 321,600.09 D1.1@332.45,611.55 ; R7.1@410,748 413.13,744.87 426.59,744.87 v1(451.73,719.73) ; R6.1 438.06,813.99 456,831.94 v1(456,833) ; C1.1 462.41,616.62 479,600.03 v1(479,586) ; v1(466,688) 467.94,688 478.94,677 C11.1 ; v1(908,509.51) 908.5,510.01 908.5,534.5 R20.2 ; v1(908,563) 908.5,563.5 908.5,589.5 R22.1 ; v1(2362,467) U1.61 ; v1(2363,532) U1.61 ; v1(2424,884) 2438,870 2438,851.8 C3.1 ; v1(2428,467) U1.61 ; v1(2428,532) 2427.03,532 U1.61 ; U1.42@2529,220.91 v1(2529,265) ; J2.2 2556.25,55 2610,108.75 2610,125.2 C12.1 ; U1.43 v1(2562.35,262.65) ; v1@2595.41,735.41 U1.2@2595.41,775.65 ; v1(2625,300) 2625.39,299.61 2665.34,299.61 U1.47@2665.59,299.35 ; v1(2626.35,265) 2626.73,265.37 2670.25,265.37 U1.46 ; v1(2627,435) 2627.39,434.61 2667.34,434.61 U1.51@2667.59,434.35 ; v1(2627,699) 2627.89,699.89 2671.13,699.89 U1.59@2672.59,701.35 ; v1(2627,734) 2627.13,734.13 2671.11,734.13 U1.60@2671.24,734 ; v1(2627.05,399.97) 2627.45,400.37 U1.50@2672.25,400.37 ; v1(2627.35,333.35) U1.48@2665.59,333.35 ; v1(2627.35,366.35) U1.49@2665.59,366.35 ; v1(2628,469) 2629.23,467.77 U1.52@2667.01,467.77 ; v1(2628,534) 2628.37,534.37 2673.25,534.37 U1.54@2673.62,534.75 ; v1(2628,569) 2628.39,568.61 2668.34,568.61 U1.55@2668.59,568.35 ; v1(2628,602) 2628.8,601.2 2667.43,601.2 U1.56@2668.24,602 ; v1(2628,633) 2628.43,633.43 2665.81,633.43 U1.57@2666.24,633 ; v1(2628,667) 2628.16,667.16 2673.03,667.16 U1.58@2673.2,667 ; v1(2629.35,501.35) U1.53@2667.59,501.35 ; v1(2646,168) 2670,192 2670,223.79 U1.65
  L1 w20: C6.1 486,382 v1(496,372) ; v1(469,859) 481,847 C17.1 ; C16.1 506.38,237.2 534.23,265.06 534.23,289.23 v1(535,290) v1(565,290) ; C15.1 v1(565,290) ; C14.1@565,337.8 v1(565,290) ; U3.2 v1(595,290) v1(565,290) ; C10.1 667,580.8 667,561.08 679,549.08 v1(679,548) ; C7.1@761.2,560 761.2,559.62 778.06,542.77 789.23,542.77 v1(790,542) ; C8.1 762.2,613.62 778.06,597.77 789.23,597.77 v1(790,597) ; U3.4 903.03,310.55 927.48,335 v1(960,335) ; C9.1 907.2,798.62 920.06,785.77 936.23,785.77 v1(937,785) ; SW1.4 1252.5,297.5 v1(1262,288) ; v1(1252.5,705.5) SW2.4 ; v1(1530,395) 1547.5,377.5 SW1.3 ; SW2.3 1620.42,838.58 v1(1640,819) ; v1(1622,624) 1622.77,624.77 1622.77,646.94 1648.62,672.8 C5.1 ; v1(1640,145) 1650,155 C4.1 ; v1(1705,180) 1706.08,180 1719.78,166.3 LED1.1 ; v1(2024,725) 2074.59,775.59 U1.63 ; v1(2069,235) 2070.08,235 2080.67,224.41 U1.64 ; v1(2285,435) U1.73@2335.01,435.02 ; v1(2285,500) v1(2285,500) U1.72 ; v1(2285,565) v1(2285,565) U1.71 ; U1.69@2394.96,564.93 v1(2395,610) v1(2395,610) ; v1(2395,385) v1(2395,385) U1.70@2395.04,430.07 ; U1.68@2464.93,435.04 v1(2510,435) v1(2510,435) ; U1.67@2464.93,500.04 v1(2510,500) v1(2510,500) ; U1.66@2464.93,560.04 v1(2510,560) v1(2510,560) ; C2.1 2565.2,848.62 2594.23,819.59 2594.23,817.77 v1(2595,817) 2595.19,816.81 2661.09,816.81 ; 2618.14,816.23 2629.28,805.1 U1.1 ; J1.1 2645,888.82 2656.41,877.41 C13.1 2656,849.59 2656,821.9 2661.09,816.81 ; U1.62 2670.62,807.28 2661.09,816.81
  other v1: 807,174 736.73,180.27 1000,335 1040,335 1080,335 1120,335 960,405 1000,405 1040,405 1080,405 1120,405 2060,450 968,470 1000,470 1040,470 1080,470 1120,470 2059,513.3 670,730 750.89,729.94 670,809 750,810
GPIO0: R2.2 R5.2 U1.4 | length 622.3
  L1 w6: R5.2 R2.2 2000.01,822 2508,822 2528.89,801.11 U1.4
GPIO1: J1.4 U1.5 | length 322.1
  L1 w6: v1(2495.42,730.42) U1.5
  L4 w6: J1.4 2345,903 2495.42,752.58 v1(2495.42,730.42)
GPIO2: J1.5 LED2.1 U1.6 | length 1589.3
  L1 w6: v1(1685,801) 1717.7,833.7 LED2.1 1750,877 1766,893 2193,893 J1.5 ; v1(2461,681) 2461.48,681.48 2461.48,775.11 U1.6
  L4 w6: v1(1685,801) 1740.72,801 1747.72,794 1826.18,794 1853.25,766.93 1923.65,766.93 1941.58,749 1961.82,749 2057,653.82 2057,653.03 2433.03,653.03 v1(2461,681)
GPIO3: J1.6 U1.7 | length 454.8
  L1 w6: U1.7 2430,774.09 v1(2430,730)
  L4 w6: J1.6 2145,943 2195,893 2324,893 2430,787 v1(2430,730)
GPIO4: J1.7 U1.8 | length 621.9
  L1 w6: v1(2395.03,680.03) U1.8
  L4 w6: J1.7 2097,893 2160,893 2180,873 2315.72,873 2395.03,793.69 v1(2395.03,680.03)
GPIO5: J1.8 U1.9 | length 590.6
  L1 w6: v1(2363,730) U1.9@2363,774.09
  L4 w6: J1.8 1997,893 2061,893 2083.14,870.86 2153.86,870.86 2171.72,853 2307.43,853 2363,797.43 v1(2363,730)
GPIO6: J1.9 U1.10 | length 761
  L1 w6: v1(2328.03,680.03) U1.10@2328.03,775.59
  L4 w6: J1.9 1897,893 1968.72,893 1988.72,873 2052.72,873 2074.86,850.86 2145.57,850.86 2165.29,831.14 2301,831.14 2328.03,804.12 v1(2328.03,680.03)
GPIO7: J1.10 U1.11 | length 727
  L1 w6: v1(2296,730) U1.11@2296,774.09
  L4 w6: J1.10 1792,898 1863.72,898 1888.72,873 1959,873 1979,853 2044.43,853 2066.57,830.86 2137.29,830.86 2157,811.14 2288,811.14 2296,803.14 v1(2296,730)
GPIO8: J1.11 U1.12 | length 883
  L1 w6: v1(2261.03,680.03) U1.12@2261.03,775.59
  L4 w6: J1.11 1697,893 1767,893 1786,874 1859.32,874 1880.32,853 1950.72,853 1970.72,833 2036.15,833 2058.29,810.86 2129.01,810.86 2148.72,791.14 2255.17,791.14 2261.03,785.29 v1(2261.03,680.03)
GPIO9: J1.12 U1.13 | length 834.1
  L1 w6: v1(2229,730) U1.13@2229,774.09
  L4 w6: J1.12 1597,893 1668.57,893 1688.57,873 1758.72,873 1777.72,854 1851.04,854 1872.04,833 1942.43,833 1962.43,813 2027.86,813 2050.01,790.86 2120.72,790.86 2140.43,771.14 2216.86,771.14 2229,759 v1(2229,730)
GPIO10: J1.13 U1.14 | length 992.6
  L1 w6: v1(2194.03,680.03) U1.14@2194.03,775.59
  L4 w6: J1.13 1497,893 1567,893 1590,870 1663.28,870 1683.28,850 1753,850 1769,834 1842.75,834 1868.18,808.57 1938.57,808.57 1955.86,791.29 2021.29,791.29 2041.72,770.86 2112.44,770.86 2132.15,751.14 2188.17,751.14 2194.03,745.29 v1(2194.03,680.03)
GPIO11: J1.14 U1.15 | length 953.5
  L1 w6: v1(2161,724.14) 2160.89,724.26 2160.89,769.97 U1.15@2161,770.09
  L4 w6: J1.14 1397,893 1467,893 1490,870 1560,870 1580,850 1655,850 1677,828 1742,828 1756,814 1834.47,814 1861.54,786.93 1931.93,786.93 1947.57,771.29 2013.01,771.29 2033.44,750.86 2104.15,750.86 2130.87,724.14 v1(2161,724.14)
GPIO12: J1.15 U1.16 | length 994.3
  L1 w6: v1(1960,711) 1962.68,713.68 1986.39,713.68 1986.72,714 1995,714 2011,698 2042.63,698 2078.88,734.25 U1.16
  L4 w6: J1.15 1297,893 1360,893 1380,873 1458.72,873 1481.72,850 1550,850 1608,792 1655.82,792 1673.82,774 1769.82,774 1832.82,711 v1(1960,711)
GPIO13: J1.16 U1.17 | length 1098.6
  L1 w6: v1(1991,673) 2045.91,673 2073.7,700.79 U1.17
  L4 w6: J1.16 1197,893 1263,893 1283,873 1351.72,873 1371.72,853 1450.43,853 1473.43,830 1541.72,830 1599.72,772 1647.53,772 1665.53,754 1761,754 1828,687 1921.5,687 1935.5,673 v1(1991,673)
GPIO14: J1.17 U1.18 | length 1207.1
  L1 w6: v1(1961,646) 2047.2,646 2068.52,667.32 U1.18
  L4 w6: J1.17 1098,892 1167,892 1186,873 1254.72,873 1274.72,853 1343.43,853 1363.43,833 1442.15,833 1465.15,810 1533.43,810 1591.43,752 1639.25,752 1657.25,734 1752.72,734 1823.9,662.82 1917.39,662.82 1934,646.21 1960.79,646.21 v1(1961,646)
GPIO15: J1.18 U1.19 | length 1315.8
  L1 w6: v1(1989.15,618.78) 1989.37,619 2048.48,619 2063.34,633.86 U1.19
  L4 w6: J1.18 997,893 1067,893 1088,872 1158.72,872 1177.72,853 1246.43,853 1266.43,833 1335.15,833 1355.15,813 1433.86,813 1456.86,790 1525.15,790 1583.15,732 1630.96,732 1648.96,714 1744.43,714 1815.61,642.82 1903,642.82 1926.82,619 1988.94,619 v1(1989.15,618.78)
GPIO16: J1.19 U1.20 | length 1424.3
  L1 w6: v1(1897,609) 1900.75,609 1917.97,591.78 2049.55,591.78 2058.16,600.39 U1.20
  L4 w6: J1.19 893,897 962,897 986,873 1058.72,873 1079.72,852 1150.43,852 1169.43,833 1238.15,833 1258.15,813 1326.86,813 1346.86,793 1425.58,793 1448.58,770 1516.86,770 1574.86,712 1622.68,712 1640.68,694 1736.15,694 1821.15,609 v1(1897,609)